# Altium PCB LDR controlled LED.PcbDoc
Units mil, origin at the board's own origin, x right, y up, seen from the top; angles counter-clockwise.
Board outline 2865.4 x 1712.99 mil, 2 copper layers (Top Layer, Bottom Layer); 14 components, 9 nets, 45 pads, 0 vias.
Unrouted connection lines stored in the file: 6.
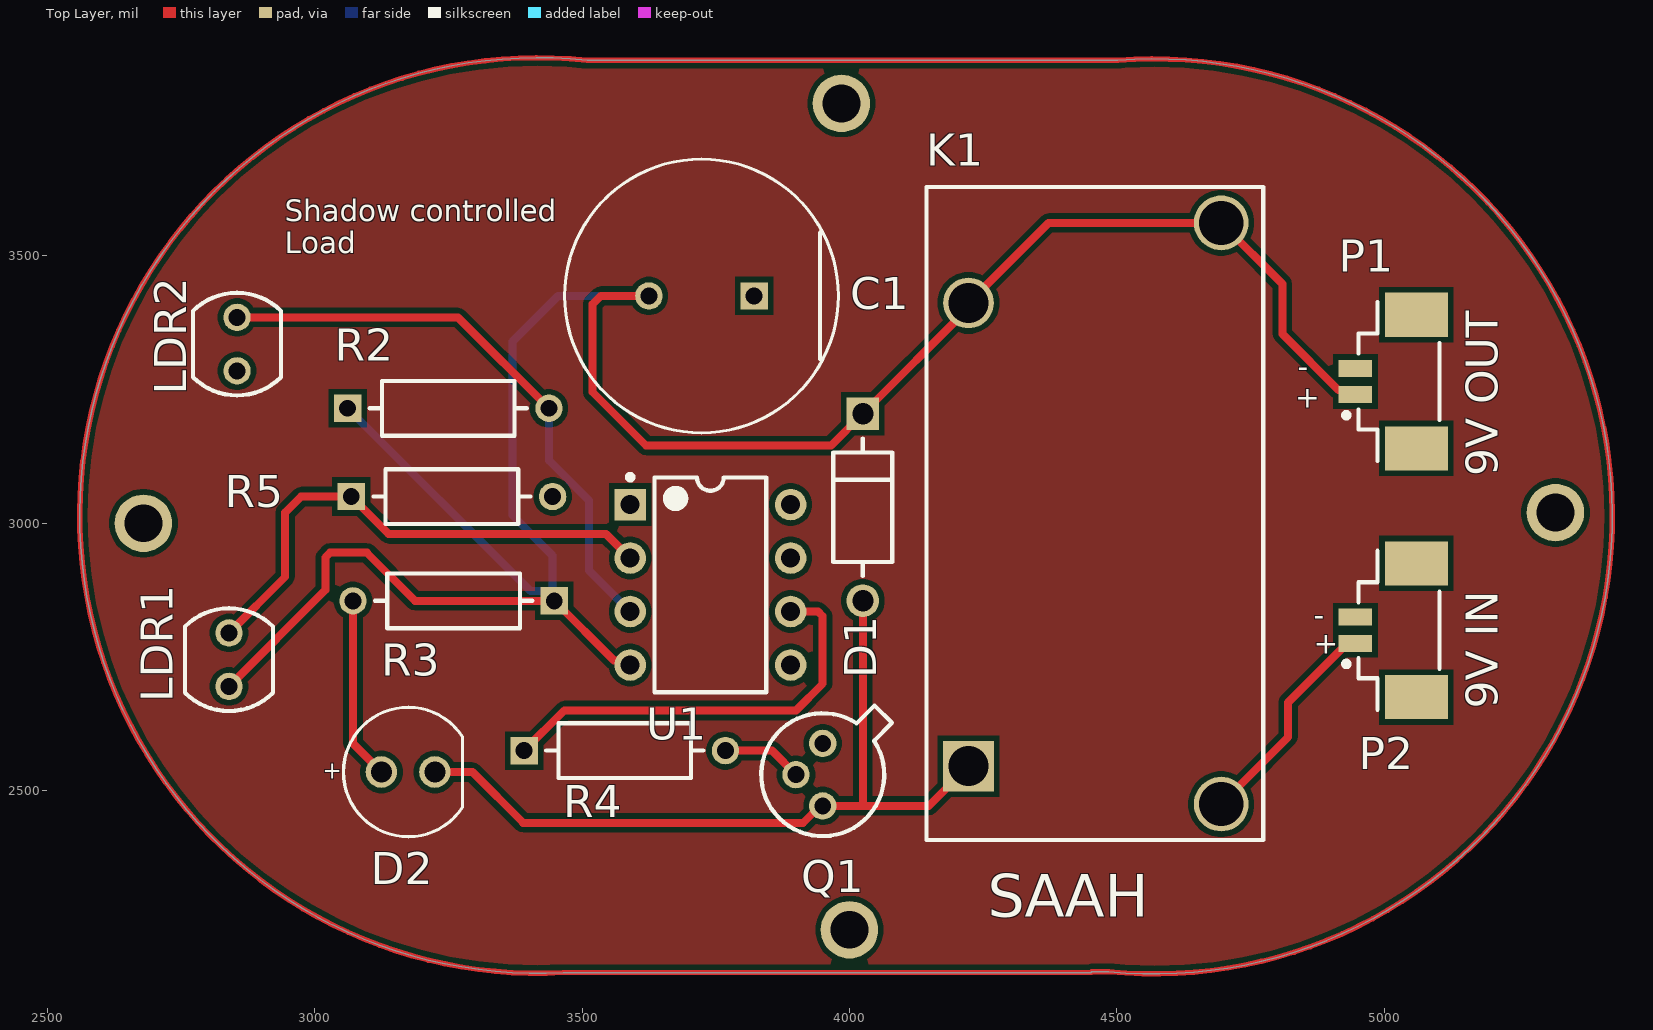
[diagram p0: Top Layer view]
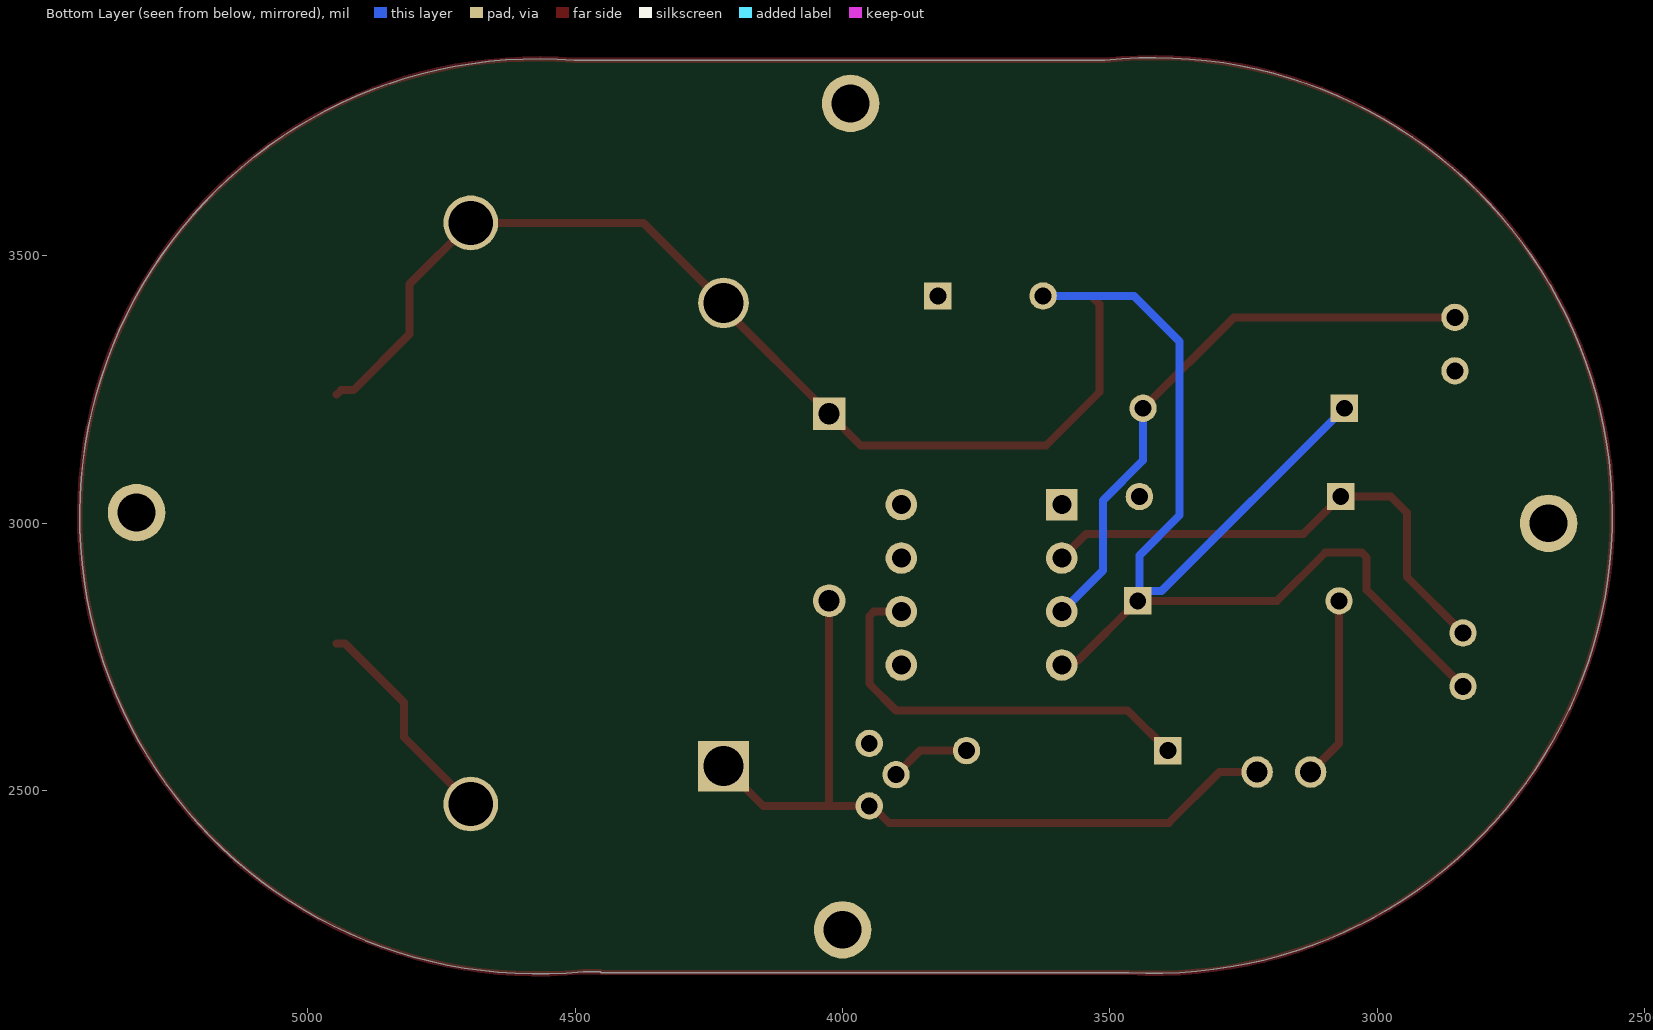
[diagram p1: Bottom Layer view, seen from below]
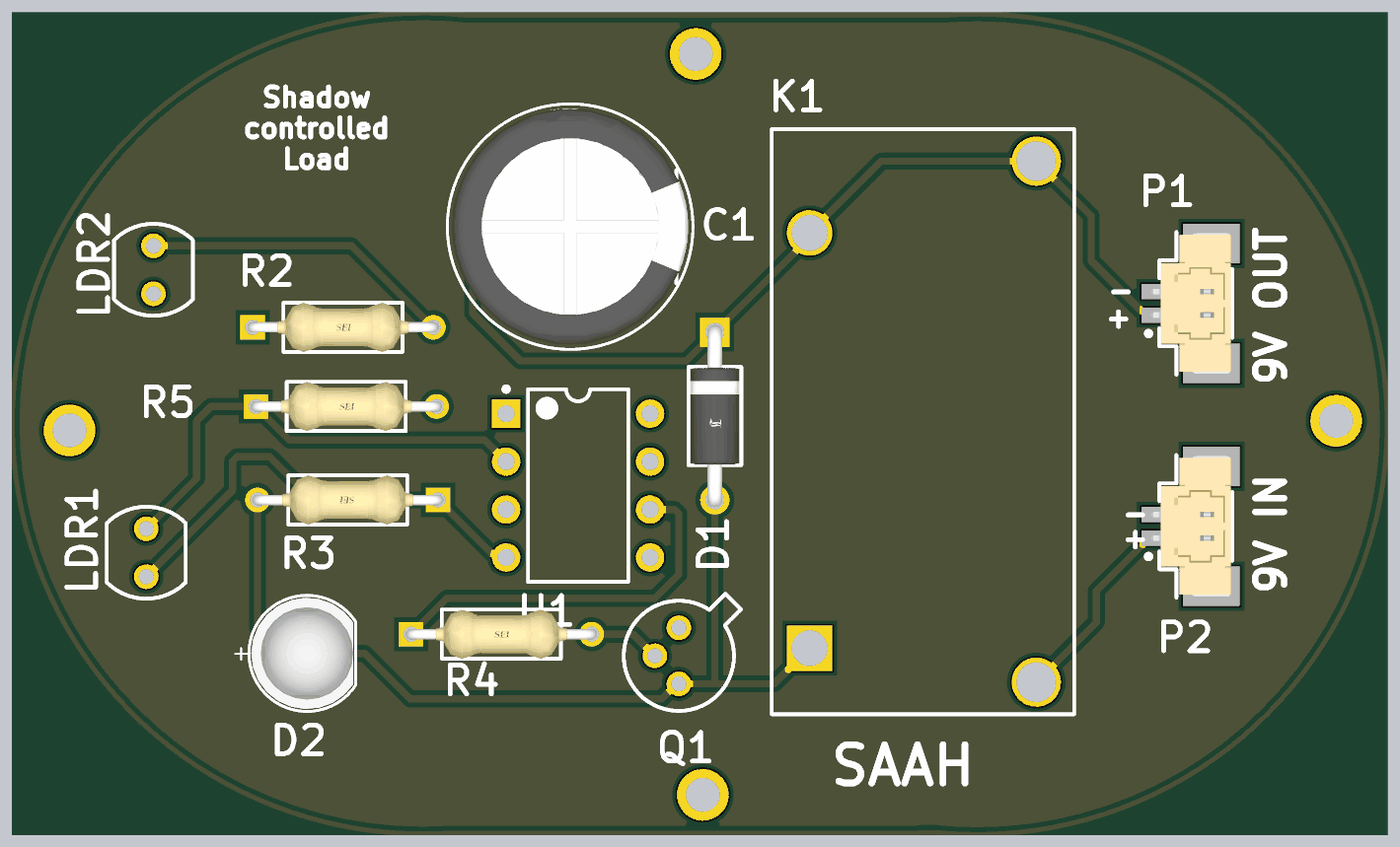
[diagram p2: 3D render of the assembled board from above, using the file's embedded part models]

## Layer stack, top to bottom
Top Solder: solder mask 0.4, Solder Resist, Dk 3.5
Top Layer: signal copper 1.4
Dielectric 1: dielectric 12.6, FR-4, Dk 4.8
Bottom Layer: signal copper 1.4
Bottom Solder: solder mask 0.4, Solder Resist, Dk 3.5

## Board outline
3465,2160 cw(c3416.73,3014.55) 3509.47,3865.43 4501.62,3865.43 cw(c4570.87,3012.83) 4484.67,2161.77 4454.05,2161.77 ccw(c4454.05,2160) 4452.28,2160

## Design rules (kind name [scope] priority, off if disabled: settings)
Clearance [All] p1: gap=10 ignorepadtopadclearanceinfootprint=FALSE
PolygonConnect [All] p1: connectstyle=Relief reliefconductorwidth=10 reliefentries=4 polygonreliefangle="90 Angle" airgapwidth=10
RoutingVias [All] p1: holewidth=28 width=50 viastyle="Through Hole" minholewidth=28 minwidth=50 maxholewidth=28 maxwidth=50
SolderMaskExpansion [All] p1: expansion=4 istentingtop=FALSE
SupplyNets "Schematic Supply Nets_1" [InNet('VCC')] p1: voltage=0.000
SupplyNets "Schematic Supply Nets" [InNet('GND')] p2: voltage=0.000
Width [All] p1: maxlimit=30 minlimit=10 preferedwidth=20 minimp=50.000000 maximp=50.000000 favimp=50.000000
30 further rules are at their usual default settings.

## Components (designator, comment, footprint, x,y, rotation, side; value= is the part's Value field where it differs from the comment)
C1 "100nF" FP-RAD-TH-D_12_5_0_5-L_20-MFG 3723.43,3425 r180 top
D1 "1N4007" FP-1N4007-MFG 4025,3030 r270 top value=15pF
D2 "LED" WL-TMRC_D5.9H8.7 3174.99,2534.99 r0 top
K1 "ALFG1PF09" PNSC-LF-G-4-3010x1570x2330_V 4222.56,2545.87 r90 top
LDR1 "VT90N1" EXCE-VT90N1 2840,2745 r270 top (schematic designator R1)
LDR2 "VT90N1" EXCE-VT90N1 2855,3335 r90 top (schematic designator R6)
P1 "653102124022" 653102124022 5027.32,3265 r90 top
P2 "653102124022" 653102124022 5027.32,2800 r90 top
Q1 "2N2222" MLTC-TO-18-3 3950,2530 r270 top
R2 "10k" FP-CF14-MFG 3250,3215 r0 top
R3 "470" FP-CF14-MFG 3260,2855 r180 top
R4 "1k" FP-CF14-MFG 3580,2575 r0 top
R5 "10k" FP-CF14-MFG 3256.81,3050 r0 top
U1 "LM741CN/NOPB" P0008A 3740,2885 r0 top

## Footprints (in the part's own frame and the unit in brackets; to place one, negate y for a bottom-side part, rotate by r counter-clockwise, add the part's x,y. Pads: shape width x height; smd on the part's side, far side on the other; paste and mask are expansions set on the pad)
653102124022 [mm] "1.25mm SMT Male Vertical Shrouded Header, 2p"
  rect 0.81x1.6 smd: 1(-0.625,2.07) 2(0.625,2.07)
  rect 2.1x3 smd: MP1(-3.175,-0.83) MP2(3.175,-0.83)
  silkscreen extent -3.77,-1.92 3.77,2.62, body extent -3.72,-1.85 3.72,2.36, height 4.74
EXCE-VT90N1 [mm] "THD, 2-Leads, Body Width 4.17mm (Max), Height 2.29mm"
  round 1.3 hole 0.8: 1(-1.27,0) 2(1.27,0)
  silkscreen extent -2.44,-2.08 2.44,2.08, body extent -2.44,-2.09 2.44,2.09, height 2.29
FP-1N4007-MFG [mm]
  rect 1.55x1.55 hole 1 paste-2539.97 mask+0: 1(-4.44,0)
  round 1.55 hole 1 paste-2539.97 mask+0: 2(4.44,0)
  silkscreen extent -3.26,-1.4 3.26,1.4, body extent -5.32,-1.5 5.32,1.5, height 0.25
FP-CF14-MFG [mm]
  rect 1.3x1.3 hole 0.8 paste-2539.97 mask+0: 1(-4.78,0)
  round 1.3 hole 0.8 paste-2539.97 mask+0: 2(4.78,0)
  silkscreen extent -3.73,-1.3 3.73,1.3, body extent -5.53,-1.4 5.53,1.4, height 0.25
FP-RAD-TH-D_12_5_0_5-L_20-MFG [mm]
  rect 1.3x1.3 hole 0.8 paste-2539.97 mask+0: 1(-2.5,0)
  round 1.3 hole 0.8 paste-2539.97 mask+0: 2(2.5,0)
  silkscreen extent -6.5,-6.5 6.5,6.5, body extent -6.6,-6.6 6.6,6.6, height 0.25
MLTC-TO-18-3 [mm] "TO-18, 3-Leads"
  round 1.3 hole 0.8: 1(-1.485,0) 2(0,-1.27) 3(1.485,0)
  silkscreen extent -3.29,-2.92 2.92,3.29, body extent -3.29,-2.93 2.93,3.29, height 5.33
P0008A [mm] "DIP, 8-Leads, Body 10.15x6.6mm, Pitch 2.54mm"
  rect 1.5x1.5 hole 0.9: 1(-3.81,3.81)
  round 1.5 hole 0.9: 2(-3.81,1.27) 3(-3.81,-1.27) 4(-3.81,-3.81) 5(3.81,-3.81) 6(3.81,-1.27) 7(3.81,1.27) 8(3.81,3.81)
  silkscreen extent -3.93,-5.1 2.65,5.23, body extent -3.95,-5.07 3.95,5.07, height 5.08
PNSC-LF-G-4-3010x1570x2330_V [mm] "LF-G, 4-Leads, Body 30.1x15.7mm"
  rect 2.4x2.4 hole 1.9: 1(0,0)
  round 2.4 hole 1.9: 2(22,0)
  round 2.6 hole 2.1: 3(-1.8,-12) 4(25.8,-12)
  silkscreen extent -3.5,-14 27.5,2, body extent -3.2,-14 27.2,2, height 23.6
WL-TMRC_D5.9H8.7 [mm] "THT Mono-color Round Color LED, 2-leads"
  round 1.5 hole 1: 1(-1.27,0) 2(1.27,0)
  silkscreen extent -3.07,-3.07 2.58,3.08, body extent -2.95,-2.95 2.45,2.95, height 9.2

## Part data
C1: library part CMP-05427-000380-1, "Aluminum Electrolytic Capacitors (Radial Lead Type) 10uF ±20% 450V", Capacitance=10uF, Case/Package=Radial, Leakage Current=280uA, Max Operating Temperature=105°C, Min Operating Temperature=-25°C, Package Quantity=200, Ripple Current=490mA, Tolerance=20%, Voltage=450V, Construction=RADIAL, Diameter=12.5mm, Dissipation Factor=0.24%, Height=20mm, Height - Seated (Max)=0.787inch, Lead Diameter=0.6mm, Lead Free="Lead Free", Lead Pitch=5mm, Length=20mm, Life (Hours)=10000Hour, Mount="Through Hole", Packaging=Bulk, Radiation Hardening=No, REACH SVHC="No SVHC", RoHS Compliant=Yes, Series=EE, Termination=Radial, Voltage Rating=450V, Voltage Rating (DC)=450V
D1: library part CMP-123542-000001-1, "Rectifier diode 1000 V 1 A DO-41, ,", Capacitance=15pF, Forward Current=1A, Manufacturer=Diotec, Max Junction Temp=+175°C, Max Repetitive Reverse Voltage=1000V, Max Surge Forward Current=27A, Peak Reverse Current=5uA, Temperature="-50°C to +175°C", Temperature Range Low=-50°C, Automotive=No, Category=Diode, ComponentLink2Description=Datasheet, ComponentLink2URL=https://datasheet.octopart.com/1N4007-Diotec-datasheet-62346875.pdf, Device Class L1="Discrete Semiconductors", Device Class L2=Diodes, Device Class L3="Rectifier Diodes", Height=2.8mm, Ipc Land Pattern Name=DIOAD888W100L520D280, Lead Free=Yes, Manufacturer Part Number=1N4007, Octopart=https://octopart.com/1n4007-diotec-4040411, Package=1N4007, Reverse Voltage=1000V, RoHS=TRUE, Temperature Range High=+175°C
D2: library part CMP-03913-71241449-1, "151051SS04000 WL-TMRC THT Mono-color Round Color", Forward Current=100mA, Forward Voltage=2.1V, Max Operating Temperature=85°C, Max Reverse Voltage (DC)=5V, Min Operating Temperature=-40°C, Dominant Wavelength=635nm, Height=8.6mm, Length=5mm, Luminous Intensity=250mcd, Mount="Through Hole", NexarPartId=71241449, Packaging=Bulk, Peak Wavelength=640nm, RoHS=Compliant, Viewing Angle=40°, Wavelength=635nm, Width=5mm
K1: library part CMP-1503-00183-1, "LF-G Relays, 9 V Coil Voltage, 1400 mW Nominal Operating Power, -40 to 85 degC, 4-Pin LF-G, Carton, Case, RoHS", Coil Voltage="9 V", Manufacturer=Panasonic, Max Switching Current="22 A AC", Max Switching Voltage="250 V AC", Nominal Operating Power="1400 mW", ComponentLink1Description="Manufacturer URL", ComponentLink1URL=http://www3.panasonic.biz/ac/ae/index.jsp, ComponentLink2Description=Datasheet, ComponentLink2URL=http://www3.panasonic.biz/ac/e_download/control/relay/power/catalog/mech_eng_lfg.pdf?f_cd=300272, ComponentLink3Description="Package Specification", ComponentLink3URL=http://www3.panasonic.biz/ac/e_download/control/relay/power/catalog/mech_eng_lfg.pdf?f_cd=300272, DatasheetVersion=201402-T, Electrical Life=3x10^4, Mechanical Life(Min.operation)=1x10^6, Mounting Technology="Through Hole", PackageDescription="4-Pin Through Hole Terminal Package, Body 30.1 x 15.7 mm", PackageReference=LF-G-4-3010x1570x2330, PackageVersion="ASCTB196E, 02/2014", Packing="Carton, Case", PartNumber=ALFG1PF09, Pb-Free=True, RoHS=True, Series="LF-G Relays"
LDR1 LDR2: library part CMP-2000-07406-1, "Photoconductive Resistor, 200 kOhm, 100 V, 80 mW, -40 to 75 degC, 2-Pin THD, RoHS", Dark Resistance=200kohm, Manufacturer="Excelitas Technology", Operating Temperature Max=75°C, Operating Temperature Min=-40°C, Package Description="2-Pin Through Hole Device, Body Width 4.17 mm (Max), Height 2.29 mm", Power Rating=80mW, Resistance @ Lux=12kohm, Resistor Case Style=-, Voltage Rating=100V, Datasheet URL=http://datasheet.octopart.com/VT90N1-Excelitas-datasheet-10388451.pdf, Datasheet Version=09/2006, Manufacturer URL=http://www.excelitas.com/Pages/Index.aspx, Mounting Technology=ThroughHole, Package Reference=VT90N1, Packaging=Each, Product Range=-, SVHC=Cadmiumchloride(15-Jun-2015)
P1 P2: library part CMP-1502-00757-2, Color="Beige, White", Contact Resistance=20mΩ, Current Rating=1A, Flammability Rating="UL94 V-0", Insulation Resistance=100MΩ, Max Operating Temperature=85°C, Min Operating Temperature=-40°C, Operating Supply Voltage=125V, Connector Type="Male Pin", Contact Gender=Male, Contact Material=Copper, Contact Mating Length=2.159mm, Contact Plating=Tin, Gender=Male, Height=4.75mm, Housing Material=Nylon, Insulation=Insulated, Lead Pitch=1.25mm, Length=7.25mm, Mount="Surface Mount", NexarPartId=18818273, Number Of Contacts=2, Number of Pins=2, Number of Positions=2, Number Of Rows=1, Orientation=Vertical, Packaging="Tape and Reel", Pitch=1.25mm, REACH SVHC=Unknown, RoHS=Compliant, Termination=SMD/SMT, Voltage Rating=125V, Width=7.25mm
Q1: library part CMP-2000-05237-1, "Low Power Bipolar NPN Transistor, 30 V, -65 to 200 degC, 3-Pin TO-18, RoHS, Bulk", Collector Emitter Voltage V(br)ceo=30V, Collector Emitter Voltage Vces=400mV, Continuous Collector Current Ic Max=800mA, Current Ic @ Vce Sat=150mA, DC Current Gain hFE=100, Full Power Rating Temperature=25degC, Manufacturer=Multicomp, Package / Case=TO-18, Package Description="3-Pin Transistor Outline Package (TO-18), Dia 5.54 mm, Pitch Pitch 1.485mm", Package Reference=TO-18-3, Power Dissipation Pd=500mW, Voltage Vcbo=60V, Current Ic Continuous a Max=800mA, Current Ic hFE=150mA, Datasheet URL=http://www.farnell.com/datasheets/1662272.pdf, Datasheet Version="Rev. 1.1, 05/2012", DC Collector Current=800mA, Gain Bandwidth ft Min=250MHz, Gain Bandwidth ft Typ=250MHz, Hfe Min=100, Manufacturer URL=http://uk.farnell.com/b/multicomp, No. of Pins=3, No. of Transistors=1, Pin Configuration=a, Power Dissipation Ptot Max=500mW, SVHC=NoSVHC(19-Dec-2012), Transistor Case Style=TO-18, Transistor Polarity=NPN
R2 R3 R4 R5: library part CMP-26528-000003-1, "RES 7.5K OHM 1/4W 5% AXIAL", Case/Package=Axial, Max Operating Temperature=155°C, Max Power Dissipation=250mW, Min Operating Temperature=-55°C, Resistance=7.5kR, Resistor Type="Carbon Film", Temperature Coefficient=-400ppm/°C, Tolerance=5%, Contact Plating=Tin, Diameter=2.3mm, Features="Flame Retardant Coating", Lead Free="Lead Free", Length=0.256inch, Mount="Through Hole", Number of Terminations=2, Packaging="Tape and Reel", Power Rating=250mW, Radiation Hardening=No, RoHS Compliant=Yes, Series=CF
U1: library part CMP-0055-00162-3, "Operational Amplifier, 8-pin MDIP, Pb-Free", Manufacturer="Texas Instruments", Package Reference=P0008A, PackageTopMarking=NSUZXYTTE#*LM*741CN, PowerWise=N, Code_JEDEC=MS-001-BA, ComponentLink1Description="Datasheet URL", ComponentLink1URL=http://www.ti.com/general/docs/lit/getliterature.tsp?genericPartNumber=LM741&fileType=pdf, CompType=Amplifiers, PackageDescription="MDIP, .365 x .250 x .130in, 8 Lead, .100in Pitch", PinCount=8, RoHS=Y

## Free pads (board coordinates)
  round 107.48 hole 70.71: 6(5320,3020) 7(2680,3000) 8(4000,2240) 9(3985,3785)

## Nets (pads, with @x,y where several pads share a name; then routed paths per layer and width w, separated by ;. In a path a pad name is that pad's centre, name@x,y a point inside that pad or via, vN(x,y) a via of type N, cw(c..) or ccw(c..) an arc to the next point about the centre after c; other vN are vias at no path point)
GND: C1.1 LDR2.1 P1.2 P2.2 Q1.1 R5.2 U1.7
LOAD: K1.3 P2.1 | length 413.4
  Top Layer w15: K1.3 4820,2600 4820,2665.12 4930.28,2775.39 P2.1
NetD1_2: D1.2 D2.2 K1.1 Q1.3 | length 1464.4
  Top Layer w15: D2.2 3295,2535 3390,2440 3913.53,2440 3945.06,2471.54 Q1.3 4025,2471.54 ; D1.2 4025,2471.54 ; K1.1 4148.23,2471.54 4025,2471.54
NetD2_1: D2.1 R3.2 | length 342
  Top Layer w15: R3.2 3071.81,2588.19 D2.1
NetQ1_2: Q1.2 R4.2 | length 150.5
  Top Layer w15: R4.2 3855,2575 Q1.2
NetR1_1: LDR1.1 R5.1 U1.2 | length 973.6
  Top Layer w15: LDR1.1 2945,2900 2945,3020 2975,3050 R5.1 3138.62,2980 3545,2980 U1.2
NetR2_2: LDR2.2 R2.2 U1.3 | length 1101.5
  Top Layer w15: LDR2.2 3268.19,3385 R2.2 ; U1.3@3585,2835 U1.3
  Bottom Layer w15: R2.2 3438.19,3117.75 3513.34,3042.6 3513.34,2911.66 U1.3
NetR4_1: R4.1 U1.6 | length 799.8
  Top Layer w15: R4.1 3466.81,2650 3900,2650 3950,2700 3950,2826.21 3941.21,2835 U1.6
VCC: C1.2 D1.1 K1.2 K1.4 LDR1.2 P1.1 R2.1 R3.1 U1.4 | length 4403.3
  Top Layer w15: LDR1.2 3020,2875 3020,2936.21 3028.79,2945 3097.69,2945 3187.69,2855 R3.1 3559.76,2743.43 3581.57,2743.43 U1.4 ; C1.2 3535,3425 3520,3410 3520,3245 3620,3145 3965.2,3145 D1.1 4222.56,3402.36 K1.2 4372.17,3561.61 K1.4 4809.4,3447.22 4809.4,3353.84 4914.4,3248.84 4937.38,3248.84 P1.1
  Bottom Layer w15: R2.1 3403.72,2873.09 R3.1@3430.1,2873.09 ; R3.1 3445,2858.19 3445,2940 3370,3015 3370,3340 3455,3425 C1.2
pads on no net: P1.MP1 P1.MP2 P2.MP1 P2.MP2 U1.1 U1.5 U1.8
copper on no net: | length 7686
  Top Layer w10: 3465,2160 cw(c3416.73,3014.55) 3509.47,3865.43 4501.62,3865.43 cw(c4570.87,3012.83) 4484.67,2161.77 4454.05,2161.77 ccw(c4454.05,2160) 4452.28,2160 3465,2160

## Polygon pours and split planes (outlines as drawn)
no net on Top Layer "NONET_L01_P000" (solid, pour order 0): 3465,2160 cw(c3416.73,3014.55) 3509.47,3865.43 4501.62,3865.43 cw(c4570.87,3012.83) 4484.67,2161.77 4454.05,2161.77 ccw(c4454.05,2160) 4452.28,2160

## Silkscreen, mask and mechanical layers (free items; w line width, h text height)
Top Overlay:
  text "Shadow controlled  / Load" at 2944.27,3505 h40
  text "-" at 4838,3273.01 h40
  text "+" at 4833,3216.34 h40
  text "9V OUT" at 5212,3088 h60 r90
  text "-" at 4868,2808.01 h40
  text "+" at 4868,2756.34 h40
  text "9V IN" at 5212,2653 h60 r90
  text "SAAH" at 4259,2264 h80

## Text inside footprints (layer, text, board x,y; h text height)
D2: Top Overlay "+" at 3015.54,2522 h31.5